# Altium PCB HV_Manager.PcbDoc
Units mm, origin at the board's own origin, x right, y up, seen from the top; angles counter-clockwise.
Board outline 132.97 x 62.61 mm, 2 copper layers (Top Layer, Bottom Layer); 79 components, 63 nets, 330 pads, 37 vias.
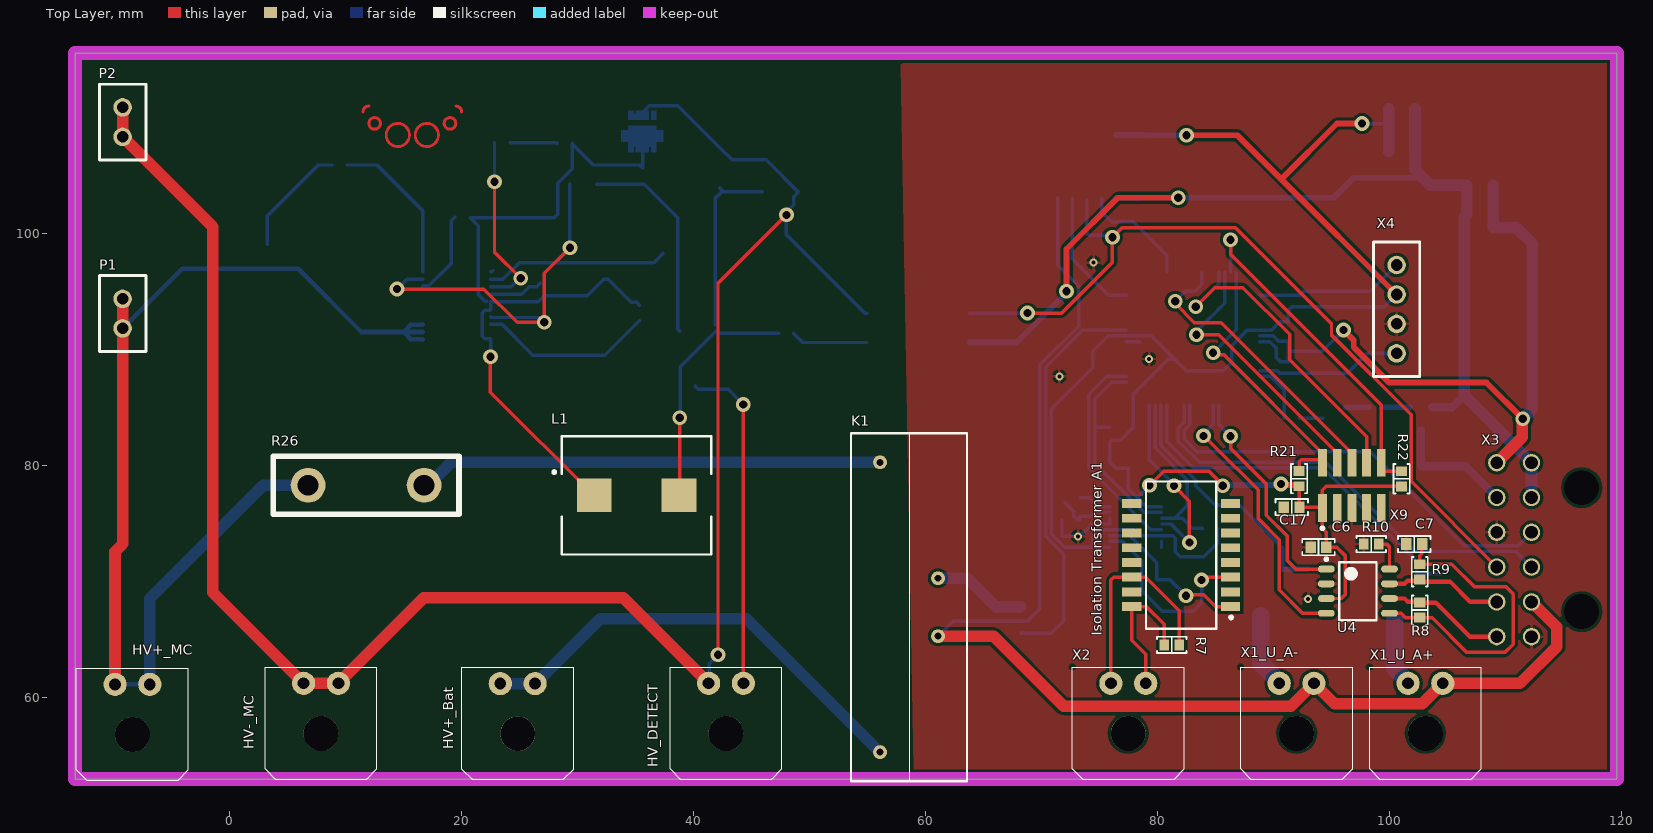
[diagram p0: Top Layer view]
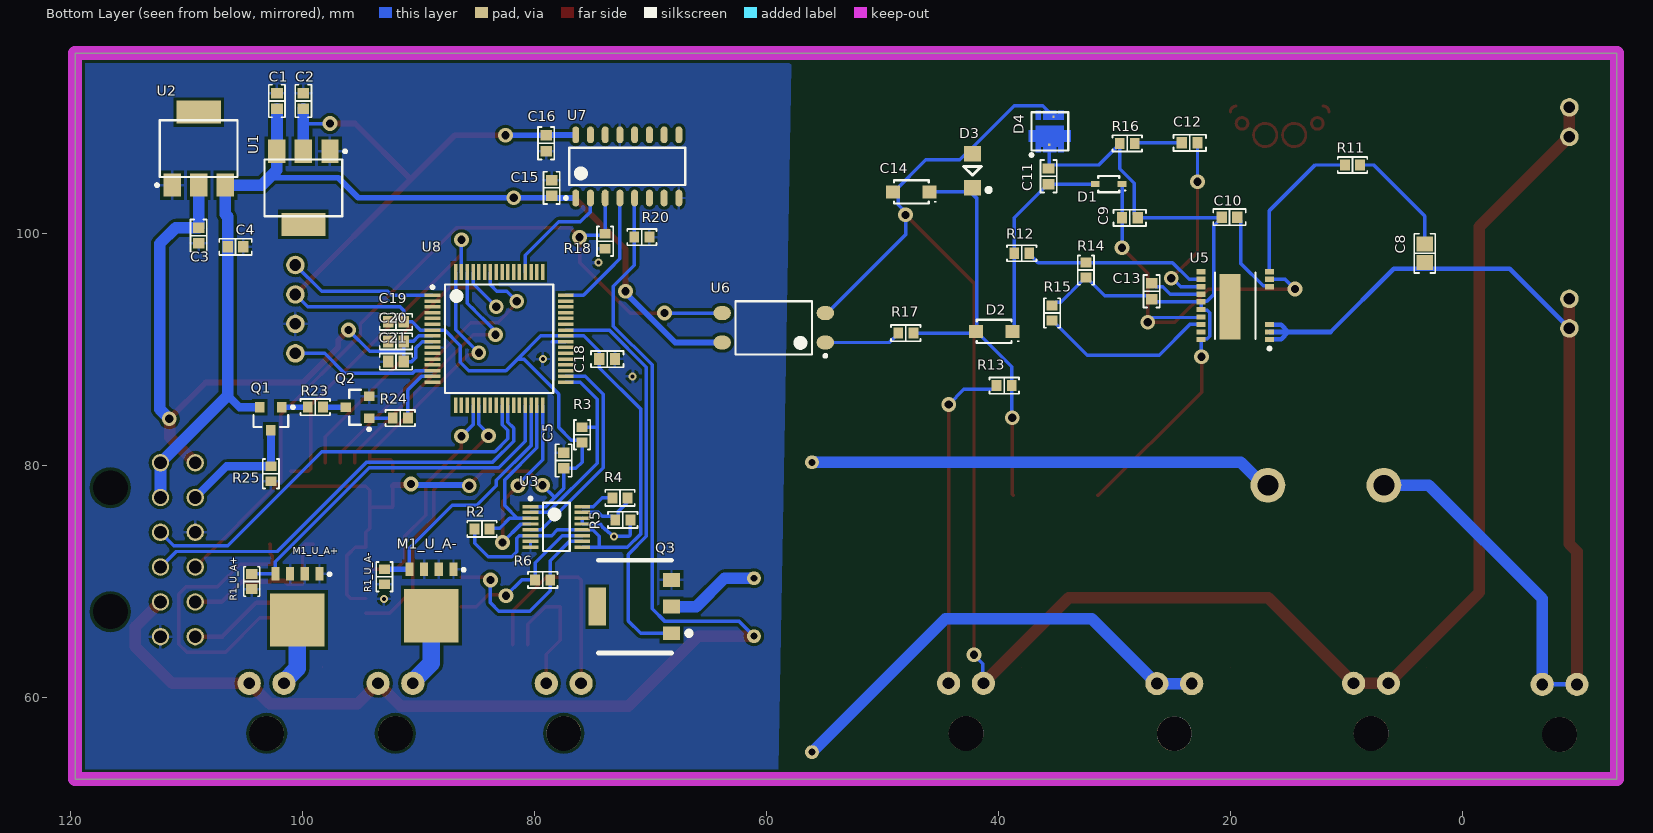
[diagram p1: Bottom Layer view, seen from below]
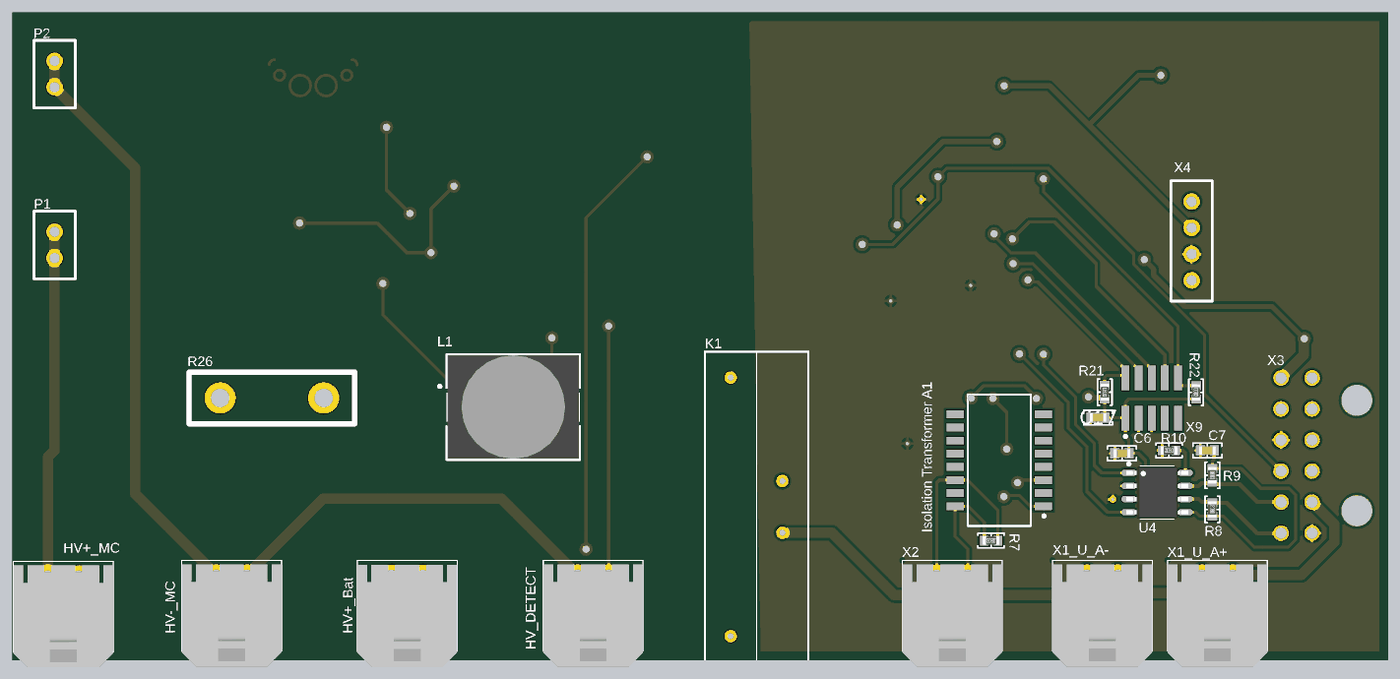
[diagram p2: 3D render of the assembled board from above, using the file's embedded part models]
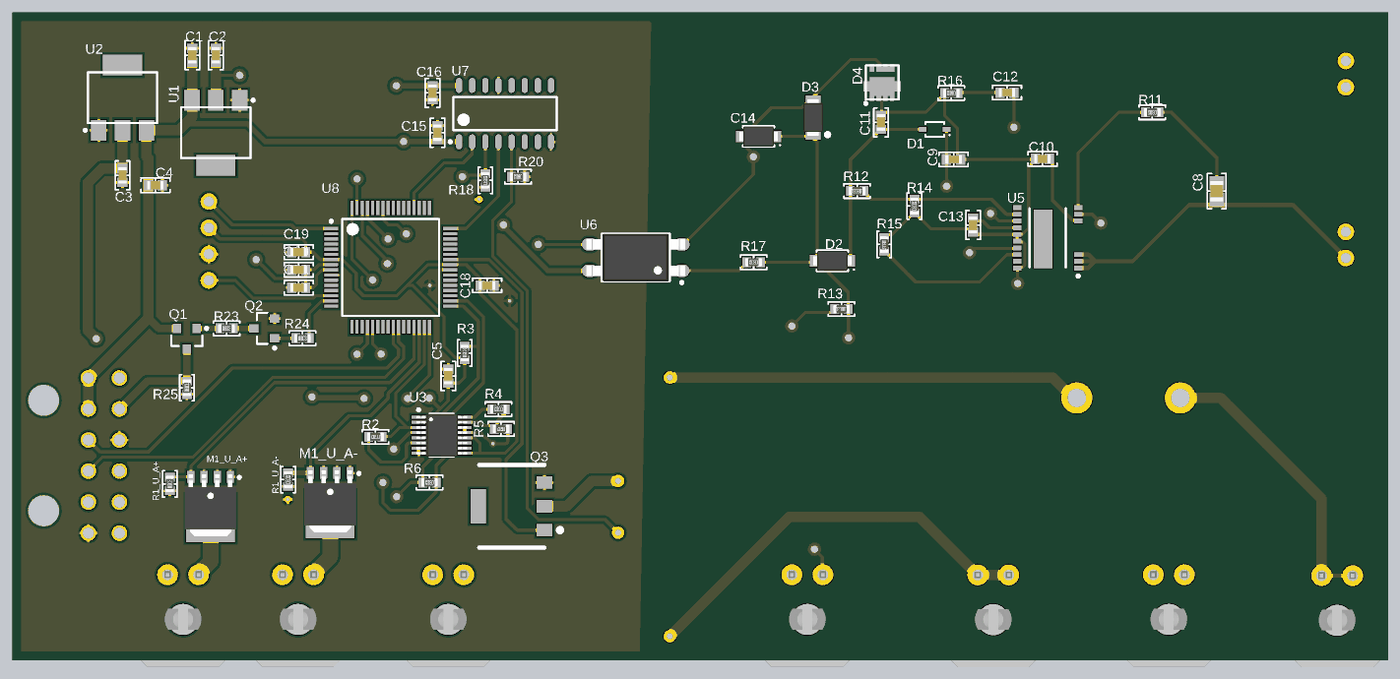
[diagram p3: 3D render of the assembled board from below, using the file's embedded part models]

## Layer stack, top to bottom
Top Solder: solder mask 0.0102, Solder Resist, Dk 3.5
Top Layer: signal copper 0.0356
Dielectric 1: dielectric 0.32, FR-4, Dk 4.8
Bottom Layer: signal copper 0.0356
Bottom Solder: solder mask 0.0102, Solder Resist, Dk 3.5

## Board outline
119.634,115.57 119.634,52.959 -13.335,52.959 -13.335,115.57

## Design rules (kind name [scope] priority, off if disabled: settings)
Clearance [All] p1: gap=0.254 ignorepadtopadclearanceinfootprint=FALSE except(0: Arc-Hole Track-Hole SMDPad-Hole THPad-Hole Via-Hole Fill-Hole Poly-Hole Region-Hole Text-Hole; 0.2: Arc-Arc Arc-Track Arc-SMDPad Track-Track Track-SMDPad SMDPad-SMDPad Fill-Fill Fill-Poly Fill-Region Poly-Poly Poly-Region Region-Region)
DiffPairsRouting [All] p1: maxlimit=10 minlimit=0.254 mostfreqgap=0.254 toplayer_minwidth=0.3 toplayer_maxwidth=10 toplayer_prefwidth=1 bottomlayer_minwidth=0.3 bottomlayer_maxwidth=10 bottomlayer_prefwidth=1 substack1={EFEC684D-6C0E-4148-81E6-19DE09CC9F24} toplayer_{efec684d-6c0e-4148-81e6-19de09cc9f24}_maxgap=0.254 toplayer_{efec684d-6c0e-4148-81e6-19de09cc9f24}_minwidth=0.381 toplayer_{efec684d-6c0e-4148-81e6-19de09cc9f24}_maxwidth=0.381 toplayer_{efec684d-6c0e-4148-81e6-19de09cc9f24}_prefwidth=0.381 bottomlayer_{efec684d-6c0e-4148-81e6-19de09cc9f24}_maxgap=0.254 bottomlayer_{efec684d-6c0e-4148-81e6-19de09cc9f24}_minwidth=0.381 bottomlayer_{efec684d-6c0e-4148-81e6-19de09cc9f24}_maxwidth=0.381 bottomlayer_{efec684d-6c0e-4148-81e6-19de09cc9f24}_prefwidth=0.381 substack2={68C8D38E-4BFC-4960-A612-7F8D2B51FFC0} toplayer_{68c8d38e-4bfc-4960-a612-7f8d2b51ffc0}_maxgap=0.254 toplayer_{68c8d38e-4bfc-4960-a612-7f8d2b51ffc0}_minwidth=0.381 toplayer_{68c8d38e-4bfc-4960-a612-7f8d2b51ffc0}_maxwidth=0.381 toplayer_{68c8d38e-4bfc-4960-a612-7f8d2b51ffc0}_prefwidth=0.381 bottomlayer_{68c8d38e-4bfc-4960-a612-7f8d2b51ffc0}_maxgap=0.254 bottomlayer_{68c8d38e-4bfc-4960-a612-7f8d2b51ffc0}_minwidth=0.381 bottomlayer_{68c8d38e-4bfc-4960-a612-7f8d2b51ffc0}_maxwidth=0.381 bottomlayer_{68c8d38e-4bfc-4960-a612-7f8d2b51ffc0}_prefwidth=0.381 maxuncoupledlength=12.7
PolygonConnect [All] p1: connectstyle=Relief reliefconductorwidth=0.254 reliefentries=4 polygonreliefangle="90 Angle" airgapwidth=0.254
RoutingVias [All] p1: holewidth=0.711 width=1.27 viastyle="Through Hole" minholewidth=0.711 minwidth=1.27 maxholewidth=0.711 maxwidth=1.27
SolderMaskExpansion [All] p1: expansion=0.102
Width [All] p1: maxlimit=10 minlimit=0.254 preferedwidth=0.254
29 further rules are at their usual default settings.

## Classes and differential pairs
component class U_connector: X3
channel class "Air Control": U_A+ U_A-
component class U_Precharge: K1 Q3 R26 R36
component class U_MKE1xFxxxVLH: C17 C18 C19 C20 C21 Q1 Q2 R21 R22 R23 R24 R25 U8 X9
component class U_levelshift6x: C15 C16 R20 U7
component class U_HV_Detect: C8 C9 C10 C11 C12 C13 C14 D1 D2 D3 D4 HV_DETECT L1 R11 R12 R13 R14 R15 R16 R17 R18 U5 U6
component class U_DCDC: L2 P1 P2 X4
component class U_CAN_5V: C6 C7 R8 R9 R10 U4
component class "U_BMS Communications": C5 "Isolation Transformer A1" R2 R3 R4 R5 R6 R7 U3 X2
component class U_A-: M1_U_A- R1_U_A- X1_U_A-
component class U_A+: M1_U_A+ R1_U_A+ X1 X1_U_A+
component class HVBlocks: HV+_Bat HV+_MC HV-_MC
component class 12V_5V: C1 C2 C3 C4 U1 U2
differential pair DOWN: +DOWN_P -DOWN_N
differential pair CAN: +CAN_P -CAN_N

## Components (designator, comment, footprint, x,y, rotation, side; value= is the part's Value field where it differs from the comment)
C1 "capacitor" 0603 102.22,111.434 r270 bottom
C2 "capacitor" 0603 99.949,111.434 r270 bottom
C3 "capacitor" 0603 108.966,99.822 r90 bottom
C4 "capacitor" 0603 105.791,98.861 r0 bottom
C5 "capacitor" 0603 77.494,80.422 r270 bottom
C6 "capacitor" 0603 93.892,72.956 r0 top
C7 "capacitor" 0603 102.151,73.23 r180 top
C8 "Value" "CAP 0805/2012" 3.245,98.294 r270 bottom
C9 "capacitor" 0603 28.672,101.362 r180 bottom
C10 "capacitor" 0603 20.083,101.412 r0 bottom
C11 "capacitor" 0603 35.685,104.939 r270 bottom
C12 "capacitor" 0603 23.514,107.829 r180 bottom
C13 "capacitor" 0603 26.785,95.027 r90 bottom
C14 "Capacitor_Electrolytic" CMMR1U-06 47.516,103.589 r0 bottom
C15 "capacitor" 0603 78.538,103.941 r270 bottom
C16 "capacitor" 0603 79.013,107.791 r90 bottom
C17 "capacitor" 0603 91.581,76.409 r0 top
C18 "capacitor" 0603 73.744,89.182 r0 bottom
C19 "capacitor" 0603 91.945,92.395 r180 bottom
C20 "capacitor" 0603 91.945,90.696 r180 bottom
C21 "capacitor" 0603 91.945,88.966 r180 bottom
D1 "Schottky" SOD323 30.497,104.264 r0 bottom
D2 "diode" CMMR1U-06 40.382,91.564 r0 bottom
D3 "" SOD123F 42.245,105.414 r270 bottom
D4 "diode" C3D1P7060Q 35.632,108.428 r180 bottom
HV+_Bat "*" "CONN 43650-0200 MOLEX 2PIN" 24.838,56.875 r0 top (schematic designator X8)
HV+_MC "*" "CONN 43650-0200 MOLEX 2PIN" -8.386,56.807 r0 top (schematic designator X6)
HV-_MC "*" "CONN 43650-0200 MOLEX 2PIN" 7.874,56.896 r0 top (schematic designator X7)
HV_DETECT "" "CONN 43650-0200 MOLEX 2PIN" 42.799,56.896 r0 top (schematic designator X5)
"Isolation Transformer A1" "HX1188NL" PULS-MODULE-16_V 82.043,72.277 r180 top
K1 "LI24-1A85" LI24-1A85 58.587,67.778 r270 top
L1 "1.5mH" SDR1005 35.088,77.429 r0 top
M1_U_A+ "PSMN2R2-25YLC" POWER-SO8 100.457,67.975 r270 bottom (schematic designator M1)
M1_U_A- "PSMN2R2-25YLC" POWER-SO8 88.9,68.356 r270 bottom (schematic designator M1)
P1 "M20-9990246" M20-9990246 -9.227,94.368 r90 top value=CONN
P2 "M20-9990246" M20-9990246 -9.227,110.878 r90 top value=CONN
Q1 "PNP Transistor" SOT23-3 102.746,84.028 r270 bottom
Q2 "MMBT4401" SOT23-3 95.274,85.028 r0 bottom
Q3 "STN3NF06L" STN3NF06L 68.199,65.532 r90 bottom
R1_U_A+ "10k" "RES 0603/1608" 104.394,69.992 r90 bottom (schematic designator R1)
R1_U_A- "10k" "RES 0603/1608" 92.964,70.406 r90 bottom (schematic designator R1)
R2 "10K" "RES 0603/1608" 84.531,74.544 r0 bottom
R3 "10K" "RES 0603/1608" 75.907,82.646 r90 bottom
R4 "1.4k" "RES 0603/1608" 72.644,77.216 r0 bottom
R5 "600" "RES 0603/1608" 72.394,75.311 r0 bottom
R6 "60" "RES 0603/1608" 79.308,70.132 r0 bottom
R7 "120" "RES 0603/1608" 81.24,64.522 r180 top
R8 "60" "RES 0603/1608" 102.626,67.53 r90 top
R9 "60" "RES 0603/1608" 102.626,70.832 r270 top
R10 "100" "RES 0603/1608" 98.442,73.23 r180 top
R11 "4.99k" "RES 0603/1608" 9.48,105.914 r0 bottom
R12 "11k" "RES 0603/1608" 37.997,98.303 r0 bottom
R13 "5k" "RES 0603/1608" 39.507,86.897 r0 bottom
R14 "1.24k" "RES 0603/1608" 32.457,96.85 r90 bottom
R15 "0.33" "RES 0603/1608" 35.377,93.147 r270 bottom
R16 "22.1 k" "RES 0603/1608" 28.897,107.773 r0 bottom
R17 "12K" "RES 0603/1608" 47.991,91.42 r0 bottom
R18 "10K" "RES 0603/1608" 73.915,99.338 r90 bottom
R20 "4.7K" "RES 0603/1608" 70.754,99.691 r0 bottom
R21 "10K" "RES 0603/1608" 92.231,78.867 r270 top
R22 "10K" "RES 0603/1608" 101.053,78.85 r270 top
R23 "5k" "RES 0603/1608" 98.914,85.028 r180 bottom
R24 "5k" "RES 0603/1608" 91.581,84.078 r180 bottom
R25 "10k" "RES 0603/1608" 102.746,79.289 r90 bottom
R26 "Resistor 1k2 100W 1% Throughhole" AP101 16.766,78.302 r180 top value=1.2k
U1 "NCP1117ST50T3G" SOT-223-3 99.949,103.941 r270 bottom
U2 "NCP1117ST50T3G" SOT-223-3 108.966,107.329 r90 bottom
U3 "LTC6820" MSOP-16 78.132,74.706 r180 bottom
U4 "MCP2561 CAN Transceiver" SOIC-8 97.292,69.166 r0 top
U5 "LT8315" TSSOP20-Thermal 19.583,93.787 r0 bottom
U6 "CPC1393" CPC1393GR 59.381,91.877 r0 bottom value=Null
U7 "CD4504BM96" SOIC-16 72.009,105.791 r90 bottom
U8 "MKE18F512VLH16" TQFP64 83.058,90.932 r180 bottom
X1_U_A+ "" "CONN 43650-0200 MOLEX 2PIN" 103.115,56.896 r0 top (schematic designator X1)
X1_U_A- "" "CONN 43650-0200 MOLEX 2PIN" 92.005,56.896 r0 top (schematic designator X1)
X2 "" "CONN 43650-0200 MOLEX 2PIN" 77.494,56.896 r0 top
X3 "4-794619-2" 4-794619-2 112.266,80.239 r90 top
X4 "4 pin header" 4pinheader 100.628,97.289 r90 top
X9 "CN-2P-M-R10" HDR2X5_SMT 96.774,78.289 r0 top

## Footprints (in the part's own frame and the unit in brackets; to place one, negate y for a bottom-side part, rotate by r counter-clockwise, add the part's x,y. Pads: shape width x height; smd on the part's side, far side on the other; paste and mask are expansions set on the pad)
4-794619-2 [mm] "12 pin te"
  round 1.5 hole 1.1: 1(0,3) 2(-3,3) 3(-6,3) 4(-9,3) 5(-12,3) 6(-15,3) 7(0,0) 8(-3,0) 9(-6,0) 10(-9,0) 11(-12,0) 12(-15,0)
  round 0 hole 3: ""(-12.84,-4.32) ""(-2.16,-4.32)
4pinheader [mm]
  round 1.6 hole 1: 1(-7.62,0) 2(-5.08,0) 3(-2.54,0) 4(0,0)
  silkscreen extent -9.62,-2 2,2
0603 [mm]
  rect 0.9x1 smd: 1(-0.675,0) 2(0.675,0)
  silkscreen extent -1.4,-0.7 1.4,0.7, body extent -0.8,-0.41 0.8,0.41, height 0.82
AP101 [mm] "100W Through Hole Resistor"
  round 3 hole 1.8: 1(0,0) 2(10,0)
  silkscreen extent -3,-2.5 13,2.5, body extent -3,-2.5 13,2.5, height 24.5
C3D1P7060Q [mm]
  rect 0.2x0.2 smd paste+0 mask+0: 1(0,-0.762)
  rect 0.2x0.2 smd paste+0: 2(0.381,1.651)
  Top Layer region: -1.143,0.889 1.247,0.889 1.247,0.489 1.852,0.489 1.852,-0.521 1.247,-0.521 1.247,-1.421 0.807,-1.421 0.807,-0.921 0.597,-0.921 0.597,-1.421 0.157,-1.421 0.157,-0.921 -0.053,-0.921 -0.053,-1.421 -0.493,-1.421 -0.493,-0.921 -0.703,-0.921 -0.703,-1.421 -1.143,-1.421 -1.143,-0.521 -1.748,-0.521 -1.748,0.489 -1.143,0.489
  Top Layer region: -0.493,1.379 1.247,1.379 1.247,2.179 0.807,2.179 0.807,1.879 0.597,1.879 0.597,2.179 0.157,2.179 0.157,1.879 -0.053,1.879 -0.053,2.179 -0.493,2.179
  Top Layer region: -1.143,1.379 -0.703,1.379 -0.703,2.179 -1.143,2.179
  silkscreen extent -1.64,-1.77 1.65,2.03
"CAP 0805/2012" [mm] "Chip Capacitor, 2-Leads, Body 2.00x1.20mm, IPC Medium Density"
  rect 1.3x1.4 smd: 1(-0.8,0) 2(0.8,0)
  silkscreen extent -1.7,-0.9 1.7,0.9, body extent -1,-0.64 1,0.64, height 1.26
CMMR1U-06 [mm] "SODFL, 2-Leads, Body 1.80x3.75mm, IPC Medium Density"
  rect 1.2x1.1 smd: 1(-1.575,0) 2(1.575,0)
  silkscreen extent -2.12,-1 1.5,1, body extent -1.87,-0.97 1.87,0.98, height 1.08
"CONN 43650-0200 MOLEX 2PIN" [mm] "MOLEX-43650-0200, 2PIN"
  round 2 hole 1.02: 1(-1.5,4.32) 2(1.5,4.32)
  round 3 hole 3 unplated: MH(0,0)
  Top Layer lines w0.1: -4.824,5.715 -4.822,5.713
  silkscreen extent -4.82,-3.94 4.83,5.71, body extent -4.82,-4.58 4.83,5.32, height 5.62
CPC1393GR [mm] "CPC1393GR, 4-Leads, Body 4.57x6.35mm, Pitch 2.54mm, IPC Medium Density"
  oval 1.5x1.2 smd: 1(-4.45,1.27) 2(-4.45,-1.27) 3(4.45,-1.27) 4(4.45,1.27)
  silkscreen extent -4.57,-2.3 3.3,2.54, body extent -4.76,-2.3 4.76,2.3, height 3.3
HDR2X5_SMT [mm] "Header, 10-Leads, Body 3.43x6.35mm, Pitch 1.27mm"
  rect 0.76x2.4 smd: 1(-2.54,-1.95) 2(-2.54,1.95) 3(-1.27,-1.95) 4(-1.27,1.95) 5(0,-1.95) 6(0,1.95) 7(1.27,-1.95) 8(1.27,1.95) 9(2.54,-1.95) 10(2.54,1.95)
  silkscreen extent -2.66,-3.82 -2.41,-3.58, body extent -3.17,-1.72 3.17,1.72, height 4.55
LI24-1A85 [mm]
  round 1.2 hole 0.6: 1(2.5,2.5) 2(-2.5,2.5) 3(12.5,-2.5) 4(-12.5,-2.5)
  silkscreen extent -15,-5 15,5
M20-9990246 [mm]
  round 1.6 hole 1: 1(-2.54,0) 2(0,0)
  silkscreen extent -4.54,-2 2,2
MSOP-16 [mm]
  rect 1.35x0.3 smd: 1(-2.225,1.75) 2(-2.225,1.25) 3(-2.225,0.75) 4(-2.225,0.25) 5(-2.225,-0.25) 6(-2.225,-0.75) 7(-2.225,-1.25) 8(-2.225,-1.75) 9(2.225,-1.75) 10(2.225,-1.25) 11(2.225,-0.75) 12(2.225,-0.25) 13(2.225,0.25) 14(2.225,0.75) 15(2.225,1.25) 16(2.225,1.75)
  silkscreen extent -2.35,-2.08 1.15,2.57, body extent -2.45,-2.05 2.45,2.05, height 1.1
POWER-SO8 [mm]
  rect 4.6x4.7 smd: D(1.3,0)
  rect 1.15x0.7 smd: G(-2.7,-1.905) S(-2.7,-0.635) S(-2.7,0.635) S(-2.7,1.905)
  silkscreen extent -2.77,2.65 -2.53,2.9, body extent -2.95,-2.5 3.05,2.5, height 1.25
PULS-MODULE-16_V [mm] "SOIC, 16-Leads, Body 12.7x7.11mm, Pitch 1.27mm"
  rect 1.67x0.76 smd paste+0: 1(-4.265,4.445) 2(-4.265,3.175) 3(-4.265,1.905) 4(-4.265,0.635) 5(-4.265,-0.635) 6(-4.265,-1.905) 7(-4.265,-3.175) 8(-4.265,-4.445) 9(4.265,-4.445) 10(4.265,-3.175) 11(4.265,-1.905) 12(4.265,-0.635) 13(4.265,0.635) 14(4.265,1.905) 15(4.265,3.175) 16(4.265,4.445)
  silkscreen extent -4.44,-6.35 3.03,6.35, body extent -3.55,-6.35 3.55,6.35, height 5.97
"RES 0603/1608" [mm] "Chip Resistor, 2-Leads, Body 1.60x0.80mm, IPC Medium Density"
  rect 0.85x0.95 smd: 1(-0.65,0) 2(0.65,0)
  silkscreen extent -1.27,-0.7 1.27,0.7, body extent -0.8,-0.4 0.8,0.4, height 0.45
SDR1005 [mm] "Precision Wire Wound Inductor, 2-Leads, Body 12.70x10.00mm, IPC Medium Density"
  rect 3x2.9 smd: 1(-3.65,0) 2(3.65,0)
  silkscreen extent -7.22,-5.1 6.45,5.1, body extent -6.45,-5 6.45,5, height 5.4
SOD123F [mm] "SODFL, 2-Leads, Body 1.80x3.50mm, IPC Low Density"
  rect 1.35x1.45 smd: 1(-1.475,0) 2(1.475,0)
  silkscreen extent -0.38,-0.76 1.75,1.5, body extent -1.75,-0.95 1.75,0.95, height 1.15
SOD323 [mm] "Not to be confused with SOD323F"
  rect 0.75x0.5 smd: 1(-1.15,0) 2(1.15,0)
  silkscreen extent -1.47,-0.7 0.9,0.7, body extent -0.9,-0.67 0.9,0.67, height 0.9
SOIC-8 [mm] "SOIC, 8-Leads, Body 4.90x3.90mm, Pitch 1.27mm, IPC Medium Density"
  oval 1.45x0.6 smd: 1(-2.725,1.905) 2(-2.725,0.635) 3(-2.725,-0.635) 4(-2.725,-1.905) 5(2.725,-1.905) 6(2.725,-0.635) 7(2.725,0.635) 8(2.725,1.905)
  silkscreen extent -2.85,-2.5 1.6,2.88, body extent -3,-2.5 3,2.5, height 1.75
SOIC-16 [mm]
  oval 1.45x0.6 smd: 1(-2.725,4.445) 2(-2.725,3.175) 3(-2.725,1.905) 4(-2.725,0.635) 5(-2.725,-0.635) 6(-2.725,-1.905) 7(-2.725,-3.175) 8(-2.725,-4.445) 9(2.725,-4.445) 10(2.725,-3.175) 11(2.725,-1.905) 12(2.725,-0.635) 13(2.725,0.635) 14(2.725,1.905) 15(2.725,3.175) 16(2.725,4.445)
  silkscreen extent -2.85,-5 1.6,5.42, body extent -2,-5 2,5, height 1.75
SOT23-3 [mm] "SOT23, 3-Leads, Body 2.92x2.37mm, Pitch 0.95mm, IPC Medium Density, NUP2105L"
  rect 0.9x0.8 smd: 1(-1,0.95) 2(-1,-0.95) 3(1,0)
  silkscreen extent -1.12,-1.5 0.7,2.02, body extent -0.7,-1.52 0.7,1.52, height 1.11
SOT-223-3 [mm] "SOT223127P600-8N, NCP1117STAT3G, MMBT4403-7-F"
  rect 2x1.5 smd: 1(-3.15,2.3) 2(-3.15,0) 3(-3.15,-2.3)
  rect 2x3.8 smd: THM(3.15,0)
  silkscreen extent -3.27,-3.35 2.45,3.72, body extent -1.85,-3.35 1.85,3.35, height 1.8
STN3NF06L [mm] "N-channel Power MOSFET"
  rect 1.2x1.5 smd: 1(0,0) 2(2.3,0) 3(4.6,0)
  rect 3.3x1.5 smd: 4(2.3,6.4)
  silkscreen extent -1.7,-1.7 6.3,6.3
TQFP64 [mm] "TSQFP, 64-Leads, Body 10.00x10.00mm, Pitch 0.50mm, IPC Medium Density, MKE18F512VLH16"
  rect 1.35x0.3 smd: 1(-5.75,3.75) 2(-5.75,3.25) 3(-5.75,2.75) 4(-5.75,2.25) 5(-5.75,1.75) 6(-5.75,1.25) 7(-5.75,0.75) 8(-5.75,0.25) 9(-5.75,-0.25) 10(-5.75,-0.75) 11(-5.75,-1.25) 12(-5.75,-1.75) 13(-5.75,-2.25) 14(-5.75,-2.75) 15(-5.75,-3.25) 16(-5.75,-3.75) 33(5.75,-3.75) 34(5.75,-3.25) 35(5.75,-2.75) 36(5.75,-2.25) 37(5.75,-1.75) 38(5.75,-1.25) 39(5.75,-0.75) 40(5.75,-0.25) 41(5.75,0.25) 42(5.75,0.75) 43(5.75,1.25) 44(5.75,1.75) 45(5.75,2.25) 46(5.75,2.75) 47(5.75,3.25) 48(5.75,3.75)
  rect 0.3x1.35 smd: 17(-3.75,-5.75) 18(-3.25,-5.75) 19(-2.75,-5.75) 20(-2.25,-5.75) 21(-1.75,-5.75) 22(-1.25,-5.75) 23(-0.75,-5.75) 24(-0.25,-5.75) 25(0.25,-5.75) 26(0.75,-5.75) 27(1.25,-5.75) 28(1.75,-5.75) 29(2.25,-5.75) 30(2.75,-5.75) 31(3.25,-5.75) 32(3.75,-5.75) 49(3.75,5.75) 50(3.25,5.75) 51(2.75,5.75) 52(2.25,5.75) 53(1.75,5.75) 54(1.25,5.75) 55(0.75,5.75) 56(0.25,5.75) 57(-0.25,5.75) 58(-0.75,5.75) 59(-1.25,5.75) 60(-1.75,5.75) 61(-2.25,5.75) 62(-2.75,5.75) 63(-3.25,5.75) 64(-3.75,5.75)
  silkscreen extent -5.88,-4.67 4.67,4.68, body extent -5,-5 5,5, height 1.6
TSSOP20-Thermal [mm] "Standard TSSOP20 package with an exposed thermal pad underneath"
  rect 0.8x0.45 smd: 1(-2.95,2.925) 2(-2.95,2.275) 3(-2.95,1.625) 8(-2.95,-1.625) 9(-2.95,-2.275) 10(-2.95,-2.925) 11(2.95,-2.925) 12(2.95,-2.275) 13(2.95,-1.625) 14(2.95,-0.975) 15(2.95,-0.325) 16(2.95,0.325) 17(2.95,0.975) 18(2.95,1.625) 19(2.95,2.275) 20(2.95,2.925)
  rect 1.78x5.68 smd: 21(0.45,0.1)
  silkscreen extent -3.07,-2.85 1.75,3.82

## Part data
C1 C2 C3 C4 C9 C10: library part 1, "Generic 0603 capacitor", capacitance=10uF, Dielectric=Ceramic, package=0603, percent tolerance=10, voltage=50, ESR=1, id=1, name="0603 Capacitor", quantity=0
C5 C15 C16 C17 C18 C19 C20 C21: library part 1, "Generic 0603 capacitor", capacitance=0.1uF, Dielectric=Ceramic, package=0603, percent tolerance=10, voltage=50, ESR=1, id=1, name="0603 Capacitor", quantity=0
C6: library part 1, "Generic 0603 capacitor", capacitance=1uF, Dielectric=Ceramic, package=0603, percent tolerance=10, voltage=50, ESR=1, id=1, name="0603 Capacitor", quantity=0
C7: library part 1, "Generic 0603 capacitor", capacitance=.1uF, Dielectric=Ceramic, package=0603, percent tolerance=10, voltage=50, ESR=1, id=1, name="0603 Capacitor", quantity=0
C8: library part 9, "10pF 500V Ceramic 0805", capacitance=10pF, Dielectric=Ceramic, percent tolerance=5, voltage=500, createdby="Eric Tse", createddate="12/15/2019 9:33:53 PM", id=9, link=https://www.digikey.com/product-detail/en/yageo/CC0805JRNPOBBN100/311-4254-1-ND/8025343, name=CC0805JRNPOBBN100, quantity=1, updatedby="Eric Tse", updateddate="12/15/2019 9:33:53 PM"
C11: library part 1, "Generic 0603 capacitor", capacitance=10nF, Dielectric=Ceramic, package=0603, percent tolerance=10, voltage=50, ESR=1, id=1, name="0603 Capacitor", quantity=0
C12: library part 1, "Generic 0603 capacitor", capacitance=330nF, Dielectric=Ceramic, package=0603, percent tolerance=10, voltage=50, ESR=1, id=1, name="0603 Capacitor", quantity=0
C13: library part 1, "Generic 0603 capacitor", capacitance=100nF, Dielectric=Ceramic, package=0603, percent tolerance=10, voltage=50, ESR=1, id=1, name="0603 Capacitor", quantity=0
C14: library part 10, "10µF 400V Aluminum Electrolytic Capacitors Ra", capacitance=10uF, package="SMD Can", percent tolerance=20, voltage=400, ESR=0, id=10, link=https://www.digikey.com/product-detail/en/nichicon/ULV2G100MNL1GS/493-6741-1-ND/3664308, name=ULV2G100MNL1GS, quantity=0
D1: library part 27, "30V 200mA schottky diode", createdby="Eric Tse", createddate="11/20/2019 6:50:55 PM", id=27, name=CMDSH2-3, numcircuits=1, quantity=1, updatedby="Eric Tse", updateddate="11/20/2019 6:50:55 PM", vr=30
D2: library part 28, "Diode Standard 600V 1A Surface Mount SOD-123F", package=SOD-123F, id=28, link=https://www.digikey.com/product-detail/en/central-semiconductor-corp/CMMR1U-06-TR-PBFREE/1514-CMMR1U-06TRPBFREECT-ND/4807015, name=CMMR1U-06, numcircuits=1, quantity=0, vr=600
D3: library part 10, "Zener Diode 14V 500mW ±5% Surface Mount SOD-1", package=SOD-123, id=10, link=https://www.digikey.com/product-detail/en/diodes-incorporated/DDZ9701-7/DDZ9701-7DICT-ND/3877402, name=DDZ9701, quantity=0
D4: library part 29, "Diode Silicon Carbide Schottky 600V 9.7A (DC)", package=QFN, id=29, link=https://www.digikey.com/product-detail/en/cree-wolfspeed/C3D1P7060Q/C3D1P7060QCT-ND/3586865, name=C3D1P7060Q, numcircuits=1, quantity=0, vr=600
HV+_Bat HV+_MC HV-_MC HV_DETECT X1_U_A+ X1_U_A- X2: library part 9, "Molex 43650_0200", id=9, link=https://www.digikey.com/product-detail/en/molex-llc/0436500200/WM1860-ND/268989, name=0436500200, numcontacts=2, numrows=1, Pitch="3 mm", quantity=0
"Isolation Transformer A1": library part CMP-2000-05323-1, "10/100 Base-T Single Port Surface Mount Magnetic with Turns Ratio, -40 to 85 degC, 16-Pin Module, RoHS, Tube", Inductance=-, Manufacturer="Pulse Electronics", Package Description="16-Pin Surface Mount Device, Body 12.7 x 7.11 mm, Pitch 1.27 mm", Package Reference=MODULE-16, Standard Package=40, Category=Transformers, Datasheet URL=https://datasheet.ciiva.com/26929/hx1188nl-26929858.pdf, Datasheet Version="Rev. H325.Q, 09/2009", E.T.=-, Family=PulseTransformers, Height - Seated (Max)=6.22mm, Manufacturer URL=http://www.pulseelectronics.com/, Mounting Type=SurfaceMount, Online Catalog=10/100BASE-TSinglePort, Other Names=553-1340, Other Related Documents=PackagesFNLvs.NL, PCN Design/Specification=ThermoplasticHeaderDesign28/Jun/2013, PCN Other=HaloInjunctionRes1/Sep/2015, Series=-, Size / Dimension=12.70mmLx7.11mmW, Transformer Type=IsolationandDataInterface(Encapsulated), Turns Ratio - Primary=Secondary:1:1Transmitter,1:1Receiver
K1: library part 3, "RELAY REED SPST 1A 24V", current=1, voltage=12, createdby=gray, id=3, link=https://www.digikey.com/product-detail/en/standex-meder-electronics/LI24-1A85/374-1296-ND/2208755, name=LI24-1A85, quantity=0, Type=Reed
L1: library part 11, "1.5mH inductor", package=SDR1005, resistance=6.3, Tolerance=10, createdby="Marc Wong", createddate="11/22/2019 11:10:33 PM", id=11, imax=0.25, Inductance=1.5mH, link=https://www.digikey.com/product-detail/en/bourns-inc/SDR1005-152KL/SDR1005-152KLCT-ND/2127182, name=SDR1005, quantity=1, updatedby="Marc Wong", updateddate="11/22/2019 11:10:33 PM"
M1_U_A+ M1_U_A-: library part 3, "N-Channel 25V 100A (Tc) 106W (Tc) Surface Mount LFPAK56, Power-SO8", current=100A, package=LFPAK56, id=3, link=https://www.digikey.com/product-detail/en/nexperia-usa-inc/PSMN2R2-25YLC115/1727-5299-1-ND/2674299, name=PSMN2R2-25YLC, numcircuits=1, quantity=0, rdson=2.5mOhm, Type=N_Channel, vdsmax=0, vgsmax=20, vt=4.5
P1 P2: library part 25, "2 Pin VCC Power Header, Male", Manufacturer_id=1, package=Conn, Supplier1PartNo=952-2262-ND, Voltage_Rating=Null, ComponentLink1Description=Null, ComponentLink1URL=https://www.digikey.com/product-detail/en/harwin-inc/M20-9990246/952-2262-ND/3728226, Created_By=Austin, Created_Date=12/15/2018, Drawer_id=1, idConn=25, link=https://www.digikey.com/product-detail/en/harwin-inc/M20-9990246/952-2262-ND/3728226, mfrpartno=M20-9990246, name=M20-9990246, Num_Contacts=2, Num_Rows=Null, Pitch=2.54, Supplier1=Digi-Key, Updated_By=Null
Q1: library part 13, "Bipolar (BJT) Transistor PNP 25V 1.5A 100MHz", package=SOT23-3, Power=625, createdby=Kevin, createddate="10/16/2019 7:23:00 AM", id=13, link=https://www.digikey.com/product-detail/en/micro-commercial-co/MMSS8550-L-TP/MMSS8550-L-TPMSCT-ND/2827205, name=MMSS8550-L-TP, quantity=0, Type=PNP, vcemax=25
Q2: library part 2, package=SOT23-3, id=2, link=https://www.digikey.com/product-detail/en/diodes-incorporated/MMBT4401-7-F/MMBT4401-FDICT-ND/775867, name=MMBT4401, quantity=0, Type=NPN
Q3: library part 8, "MOSFET N-CH 60V 4A SOT223", current=4A, package=SOT-233, id=8, link=https://www.digikey.com/product-detail/en/stmicroelectronics/STN3NF06L/497-3177-1-ND/654516, name=STN3NF06L, numcircuits=1, quantity=0, rdson=70m, Type=N_Channel, vdsmax=0, vgsmax=0
R1_U_A+ R1_U_A- R2 R3 R4 R5 R6 R7 R8 R9 R10 R11 R12 R13 R14 R15 R16 R17 R18 R20 R21 R22 R23 R24 R25: library part 1, package=0603, percent tolerance=5, id=1, name="0603 Resistor", quantity=0
  R1_U_A+ R1_U_A- R25: resistance=10k
  R2 R3 R18 R21 R22: resistance=10K
  R4: resistance=1.4k
  R5: resistance=600
  R6 R8 R9: resistance=60
  R7: resistance=120
  R10: resistance=100
  R11: resistance=4.99k
  R12: resistance=11k
  R13 R23 R24: resistance=5k
  R14: resistance=1.24k
  R15: resistance=0.33
  R16: resistance="22.1 k"
  R17: resistance=12K
  R20: resistance=4.7K
R26: library part 2705, "100W Throughhole Resistor", Manufacturer_id=1, mfrpartno="AP101 1K2 J", package=TO-247-2, Power=100W, Supplier Part Number 1=AP1011K2J-ND, Tolerance=5%, ComponentLink1Description=Datasheet, ComponentLink1URL=https://www.ohmite.com/assets/docs/acl_ap101.pdf?r=false, Created_By=Graydon, Created_Date=2018-11-24, Drawer_id=1, idResistor=2705, link=https://www.digikey.com/short/jvdcjz, name="AP101 1K2 J", Supplier 1=Digi-Key
U1 U2: library part 16, "5V linear regulator", package=SOT-223-3, id=16, imax=1, link=https://www.digikey.com/product-detail/en/on-semiconductor/NCP1117ST50T3G/NCP1117ST50T3GOSCT-ND/1967217, name=NCP1117ST50T3G, quantity=0
U3: library part 7, "soSPI Isolated / Communications Interface", Manufacturer_id=1, package=MSOP-16, Drawer_id=1, id=7, idFuse=3, link=https://www.mouser.com/ProductDetail/Analog-Devices/LTC6820IMSPBF?qs=sGAEpiMZZMvi6wO7nhr1LyTLeBC7dAWQpR44bZH0zYY%3d, name=null, quantity=0, Type=isoSPI, vcc=0
U4: library part 5, package=SOIC-8, id=5, link=https://www.digikey.com/product-detail/en/microchip-technology/MCP2561T-E-SN/MCP2561T-E-SNCT-ND/5148846, name=null, quantity=0, Type=CAN, vcc=0
U5: library part 19, "560Vin - 12Vout Buck Converter", createdby="Eric Tse", createddate="11/20/2019 18:54:34", id=19, imax=0.119999997317791, link=https://www.digikey.com/en/product-highlight/l/linear-tech/lt8315-isolated-flyback-converter, name=LT8315, quantity=1, updatedby="Eric Tse", updateddate="11/20/2019 18:54:34"
U6: library part 26, "Solid State Relay SPST-NO (1 Form A) 4-SMD (0.300\", 7.62mm)", Manufacturer_id=1, mfrpartno=CPC1393GRTR, package=CPC1393GR, Supplier1PartNo=Null, ComponentLink1Description=Null, ComponentLink1URL=Null, Created_By=Lynette, Data_Rate=Null, Drawer_id=1, idIC_Misc=26, link=https://www.digikey.com/product-detail/en/ixys-integrated-circuits-division/CPC1393GRTR/CLA270CT-ND/1277144, name=CPC1393, Num_Circuits=1, Protocol=Null, Supplier1=Null, Type=Null, Updated_By=Null, Vin(Max)=Null, Vin(Min)=Null
U7: library part 1, "Voltage Level Translator Unidirectional 1 Cir", package=SOIC-16, id=1, link=https://www.digikey.com/product-detail/en/texas-instruments/CD4504BM96/296-14150-2-ND/525968, name=CD4504BM96, quantity=0, Type="Level shifter CMOS-CMOS", vcc=20
U8: library part 1, "32b NXP Microcontroller", package=TQFP64, id=1, name=MKE18F512VLH16, quantity=0, vcc=2.7-5.5
X3: library part 41, "12p te", id=41, link=https://www.digikey.com/product-detail/en/te-connectivity-amp-connectors/4-794619-2/A115204-ND/2286935, name=4-794619-2, numcontacts=12, numrows=2, Pitch=3mm, quantity=0
X4: library part 40, package=.1in, id=40, name=4pinheader, numcontacts=4, numrows=1, Pitch=.1in, quantity=0
X9: library part 4, "CONN_TE_2X5POS", id=4, link=https://www.digikey.com/product-detail/en/5103309-1/A33160-ND/1114898?utm_campaign=buynow&WT.z_cid=ref_octopart_dkc_buynow&utm_medium=aggregator&curr=usd&site=us&utm_source=octopart, name=5103309-1, numcontacts=10, numrows=2, Pitch=2.54mm, quantity=0

## Via types
v1: diameter 1.27, hole 0.711, Top Layer to Bottom Layer, tented both sides, 32 vias
v2: diameter 0.7, hole 0.35, Top Layer to Bottom Layer, tented both sides, 3 vias
v3: diameter 0.7, hole 0.35, Top Layer to Bottom Layer, 2 vias

## Nets (pads, with @x,y where several pads share a name; then routed paths per layer and width w, separated by ;. In a path a pad name is that pad's centre, name@x,y a point inside that pad or via, vN(x,y) a via of type N, cw(c..) or ccw(c..) an arc to the next point about the centre after c; other vN are vias at no path point)
12V: C1.2 C4.2 C15.2 Q1.2 U1.3 U2.3 U6.4 U7.1 X3.7 X3.8 | length 95.4
  Top Layer w0.5: v1(72.169,95.032) 72.169,98.669 76.591,103.091 v1(81.808,103.091)
  Bottom Layer w0.5: U6.4 67.87,90.607 72.169,94.906 v1(72.169,95.032) ; U7.1 76.466,103.078 78.525,103.078 78.538,103.091 v1(81.808,103.091) 95.211,103.091 96.943,104.823 102.889,104.823
  Bottom Layer w0.7: Q1.2 105.455,85.028 106.466,86.039
  Bottom Layer w1: C1.2 102.22,107.12 U1.3 102.246,107.088 102.246,105.466 102.889,104.823 103.533,104.179 U2.3 106.666,101.675 106.466,101.475 C4.2 106.466,86.039 X3.7 X3.8
AIR+_EN: M1_U_A+.G R1_U_A+.2 U8.29 | length 32
  Bottom Layer w0.3: U8.29 80.808,82.089 83.097,79.8 94.262,79.8 102.362,71.7 M1_U_A+.G 104.361,70.675 R1_U_A+.2
AIR-_EN: M1_U_A-.G R1_U_A-.2 U8.30 | length 21.9
  Bottom Layer w0.3: U8.30 80.308,81.722 83.308,78.722 83.308,78.264 84.998,76.574 87.09,76.574 90.805,72.859 M1_U_A-.G
  Bottom Layer w0.5: M1_U_A-.G R1_U_A-.2
BMS_OK5: R24.2 U8.15 | length 5
  Bottom Layer w0.3: U8.15 89.756,87.682 90.931,86.507 R24.2
BMS_OK12: Q1.3 R25.2 X3.2 | length 10.7
  Bottom Layer w0.7: Q1.3 R25.2 106.566,79.939 X3.2
CAN_N: R8.2 U4.6 X3.6 | length 10.6
  Top Layer w0.381: U4.6 101.313,68.531 101.579,68.265 102.541,68.265 R8.2 104.013,68.18 106.954,65.239 X3.6
CAN_P: R9.2 U4.7 X3.5 | length 10.2
  Top Layer w0.381: U4.7 101.313,69.801 101.579,70.067 102.511,70.067 R9.2 102.816,69.992 105.233,69.992 106.986,68.239 X3.5
DCDC_En: U8.14 X4.1 | length 12.6
  Bottom Layer w0.3: U8.14 90.314,88.182 90.558,87.938 96.363,87.938 98.093,89.669 X4.1
DCDC_Fault: U8.1 X4.4 | length 12.9
  Bottom Layer w0.3: U8.1 92.314,94.682 92.664,95.032 98.371,95.032 X4.4
DOWN_N: "Isolation Transformer A1.3" R6.1 U3.10 | length 16.8
  Top Layer w0.3: v1(83.808,70.124) 84.056,70.372 86.308,70.372
  Bottom Layer w0.3: U3.10 76.994,73.456 78.658,71.792 R6.1 78.658,69.207 80.423,67.442 83.083,67.442 83.808,68.166 v1(83.808,70.124)
DOWN_P: "Isolation Transformer A1.1" R6.2 U3.11 | length 13.9
  Top Layer w0.3: v1(82.478,68.766) 82.581,68.869 83.986,68.869 85.023,67.832 86.308,67.832
  Bottom Layer w0.3: U3.11 77.613,73.956 79.958,71.611 R6.2 81.12,70.132 81.12,70.124 v1(82.478,68.766)
GND: C1.1 C2.1 C3.1 C4.1 C5.1 C6.1 C7.2 C15.1 C16.1 C17.1 C18.1 C19.1 C20.1 C21.1 M1_U_A+.S M1_U_A-.S Q2.2 Q3.3 R1_U_A+.1 R1_U_A-.1 R5.1 R10.2 R18.1 R20.1 R25.1 U1.1 U2.1 U3.7 U3.8 U3.13 U3.14 U4.2 U7.8 U7.13 U8.10 U8.40 X3.3 X3.12 X4.2 X9.3 X9.5 | length 8.1
  Bottom Layer w0.3: R5.1 71.744,74.131 ccw(c71.989,74.131) 71.989,73.885 v2(73.164,73.885) 74.219,74.743 cw(c74.432,74.743) 74.432,74.956 U3.13 U3.14 ; U8.40 78.481,90.682 ; U3.8 U3.7
  other v2: 71.554,87.682 79.282,89.182
  other v3: 93,68.5 74.5,97.5
HV+_Bat: HV+_Bat.1 HV+_Bat.2 K1.3 | length 39.8
  Bottom Layer w1: HV+_Bat.1 HV+_Bat.2 31.943,66.8 44.565,66.8 K1.3
HV+_MC: C8.2 HV+_MC.1 HV+_MC.2 P1.1 P1.2 R26.2 U5.1 U5.2 U5.3 | length 95.7
  Top Layer w1: HV+_MC.1 -9.886,72.577 -9.227,73.235 P1.1 P1.2
  Bottom Layer w0.4: HV+_MC.1 HV+_MC.2 ; P1.1 -4.093,96.962 5.923,96.962 11.372,91.512 14.993,91.512 ; U5.1 16.624,90.872 15.633,90.872 14.993,91.512 ; U5.2 14.993,91.512 ; U5.3 16.624,92.153 15.633,92.153 14.993,91.512
  Bottom Layer w1: HV+_MC.2 -6.886,68.527 2.89,78.302 R26.2
HV-_MC: C14.2 D3.1 D4.2 HV-_MC.1 HV-_MC.2 HV_DETECT.1 P2.1 P2.2 U6.2 | length 171.4
  Top Layer w0.3: v1(42.112,63.686) 42.112,95.709 v1(48.016,101.612)
  Top Layer w1: P2.2 P2.1 -1.465,100.576 -1.465,69.055 HV-_MC.1 HV-_MC.2 16.742,68.584 33.931,68.584 HV_DETECT.1
  Bottom Layer w0.3: D4.2 35.251,110.094 36.168,111.011 38.647,111.011 42.77,106.889 42.82,106.889 43.345,106.364 46.266,106.364 49.041,103.589 48.641,103.189 48.641,102.5 48.016,101.875 v1(48.016,101.612) 48.016,99.912 54.781,93.147 U6.2 ; HV_DETECT.1 41.354,61.271 41.354,62.91 42.112,63.668 v1(42.112,63.686)
IDC_1: U8.25 X3.9 | length 37.3
  Bottom Layer w0.3: U8.25 82.808,83.524 82.308,83.024 82.308,82.313 83.418,81.203 98.349,81.203 106.467,73.085 111.112,73.085 X3.9
IDC_2: U8.26 X3.10 | length 38.2
  Bottom Layer w0.3: U8.26 82.308,83.731 81.808,83.231 81.808,82.106 83.613,80.3 94.469,80.3 102.184,72.585 110.92,72.585 X3.10
JTAG_RST: R22.1 U8.63 X9.10 | length 29.8
  Top Layer w0.3: v1(86.308,99.478) 86.308,98.22 99.314,85.214 X9.10 99.314,79.73 99.544,79.5 R22.1
  Bottom Layer w0.3: U8.63 v1(86.308,99.478)
JTAG_TCLK: U8.62 X9.4 | length 24.5
  Top Layer w0.3: v1(83.377,91.285) 85.278,91.285 95.504,81.059 X9.4
  Bottom Layer w0.3: v1(83.377,91.285) 83.377,91.569 85.808,93.999 ; 85.185,93.376 85.808,93.999 ; U8.62 85.808,93.999
JTAG_TDI: U8.61 X9.8 | length 28.1
  Top Layer w0.3: v1(83.308,93.682) 84.963,95.337 87.372,95.337 91.403,91.305 91.403,89.112 98.044,82.471 X9.8
  Bottom Layer w0.3: v1(83.308,93.682) 85.308,95.682 U8.61
JTAG_TDO: U8.58 X9.6 | length 25.5
  Top Layer w0.3: v1(81.543,94.17) 81.543,93.978 83.197,92.324 85.509,92.324 96.774,81.059 X9.6
  Bottom Layer w0.3: v1(81.543,94.17) 82.405,95.032 83.253,95.032 83.808,95.587 U8.58
JTAG_TMS: R21.1 U8.64 X9.2 | length 24.6
  Top Layer w0.3: v1(84.808,89.716) 84.994,89.53 85.763,89.53 94.234,81.059 X9.2 ; R21.1 92.231,80.313 92.407,80.489 94.004,80.489 X9.2@94.234,80.259
  Bottom Layer w0.3: v1(84.808,89.716) 86.808,91.716 U8.64
NetC7_1: C7.1 R8.1 R9.1 U4.5 | length 27.6
  Top Layer w0.3: U4.5 101.02,67.261 101.401,66.88 R8.1 103.694,66.88 106.695,63.879 109.956,63.879 110.677,64.6 110.677,68.917 110.03,69.565 107.31,69.565 105.393,71.482 R9.1 102.626,72.2 102.802,72.376 102.802,73.206 C7.1
NetC8_1: C8.1 R11.1 | length 9.8
  Bottom Layer w0.3: C8.1 3.245,101.514 7.644,105.914 R11.1
NetC9_1: C9.1 D1.1 U5.9 U5.17 | length 34.1
  Top Layer w0.3: v1(14.437,95.211) 21.924,95.211 24.787,92.347 v1(27.135,92.347) 27.135,96.566 v1(29.347,98.778)
  Bottom Layer w0.3: v1(14.437,95.211) 15.289,96.062 U5.9 ; U5.17 22.582,92.763 26.719,92.763 v1(27.135,92.347) ; v1(29.347,98.778) C9.1 D1.1
NetC9_2: C9.2 C10.2 C11.1 C13.1 D4.1 L1.1 R14.1 R15.1 R16.2 U5.15 U5.16 U5.20 | length 67.3
  Top Layer w0.3: v1(22.485,89.371) 22.485,86.332 31.388,77.429 L1.1
  Bottom Layer w0.3: U5.15@22.164,94.152 22.024,94.152 21.433,94.742 21.433,100.687 20.758,101.362 C9.2 28.297,101.662 28.297,104.334 29.547,105.584 R16.2@29.547,107.723 ; v1(22.485,89.371) 22.509,89.396 22.509,90.838 U5.20 22.458,90.937 21.988,90.937 21.783,91.142 21.783,93.182 21.988,93.387 22.458,93.387 U5.16 U5.15 26.595,94.112 27.135,94.652 30.85,94.652 32.26,96.062 32.645,96.062 34.635,94.072 35.102,94.072 R15.1 ; R16.2 R16.2@29.547,107.723 ; D4.1 35.632,105.659 35.377,105.914 31.357,105.914 R16.2@29.547,107.723
NetC10_1: C10.1 U5.8 | length 7.4
  Bottom Layer w0.3: U5.8 16.708,95.487 17.178,95.487 19.108,97.417 19.108,101.112 C10.1
NetC11_2: C11.2 D1.2 D2.1 R12.2 | length 18.1
  Bottom Layer w0.3: D1.2 C11.2 35.735,104.264 38.647,101.352 38.647,91.724 D2.1
NetC12_1: C12.1 R16.1 | length 4.1
  Bottom Layer w0.3: C12.1 28.191,107.829 R16.1
NetC12_2: C12.2 U5.13 | length 15.5
  Top Layer w0.3: v1(22.839,104.464) 22.839,98.403 v1(25.104,96.137)
  Bottom Layer w0.3: U5.13 24.295,95.412 25.02,96.137 v1(25.104,96.137) ; v1(22.839,104.464) C12.2
NetC13_2: C13.2 U5.14 | length 4.6
  Bottom Layer w0.3: U5.14 25.199,94.762 25.838,95.402 26.485,95.402 C13.2
NetC14_1: C14.1 D2.2 D3.2 L1.2 R13.1 R17.1 | length 36.6
  Top Layer w0.3: L1.2 38.816,77.506 v1(38.816,84.114)
  Bottom Layer w0.3: v1(38.816,84.114) 38.836,84.135 38.836,86.877 R13.1 38.857,88.514 41.907,91.564 D2.2 42.101,91.42 R17.1 ; 41.857,92.153 41.857,103.026 42.42,103.589 D3.2@42.595,103.589 ; D3.2 D3.2@42.595,103.589 ; C14.1 D3.2@42.595,103.589
"NetIsolation Transformer A1_14": "Isolation Transformer A1.14" R7.1 X2.1 | length 19.1
  Top Layer w0.3: X2.1 75.994,70.124 76.242,70.372 77.778,70.372 78.984,70.372 81.89,67.466 R7.1
"NetIsolation Transformer A1_16": "Isolation Transformer A1.16" R7.2 X2.2 | length 12.3
  Top Layer w0.3: X2.2 78.994,63.711 77.778,64.927 77.778,67.832 79.063,67.832 80.59,66.305 R7.2
NetK1_2: K1.2 Q3.2 | length 8.1
  Bottom Layer w1: K1.2 63.63,70.278 66.076,67.832 Q3.2
NetK1_4: K1.4 R26.1 | length 40.1
  Bottom Layer w1: R26.1 17.134,78.302 19.109,80.278 K1.4
NetM1_U_A+_D: M1_U_A+.D X1_U_A+.1 | length 5.9
  Bottom Layer w1.5: M1_U_A+.D 100.457,62.509 101.615,61.351 X1_U_A+.1
NetM1_U_A-_D: M1_U_A-.D X1_U_A-.1 | length 6.5
  Bottom Layer w1.5: M1_U_A-.D 88.9,62.956 90.505,61.351 X1_U_A-.1
NetQ1_1: Q1.1 R23.1 | length 2.2
  Bottom Layer w0.5: R23.1 Q1.1
NetQ2_1: Q2.1 R24.1 | length 2
  Bottom Layer w0.3: R24.1 Q2.1
NetQ2_3: Q2.3 R23.2 | length 2
  Bottom Layer w0.5: Q2.3 R23.2
NetR2_1: R2.1 U3.3 U8.31 | length 15.2
  Bottom Layer w0.3: U8.31 79.808,81.515 82.558,78.764 82.558,76.518 81.496,75.456 ; U3.3 81.496,75.456 ; R2.1 83.881,74.594 83.025,74.594 82.163,75.456 81.496,75.456
NetR3_2: R3.2 U3.2 U8.33 | length 17.7
  Bottom Layer w0.3: R3.2 74.599,83.296 ; U8.33 76.063,87.182 74.599,85.718 74.599,83.296 ; U3.2 78.849,75.956 74.599,80.206 74.599,83.296
NetR4_1: R4.1 R5.2 U3.15 | length 5.2
  Bottom Layer w0.3: R4.1@72.039,76.777 72.769,76.047 72.769,75.636 73.094,75.311 73.294,75.311 73.294,75.611 73.319,75.636 74.19,75.636 74.51,75.956 U3.15
NetR4_2: R4.2 U3.16 | length 2.9
  Bottom Layer w0.3: R4.2 74.17,77.216 74.93,76.456 U3.16
NetR10_1: R10.1 U4.8 | length 2.9
  Top Layer w0.3: R10.1 99.763,73.23 100.017,72.976 U4.8
NetR11_2: R11.2 U5.10 | length 13.4
  Bottom Layer w0.3: R11.2 12.706,105.914 16.633,101.986 U5.10
NetR12_1: R12.1 R14.2 U5.12 | length 15.8
  Bottom Layer w0.3: U5.12 23.56,96.062 24.997,97.5 36.593,97.5 37.347,98.253 R12.1
NetR13_2: HV_DETECT.2 R13.2 | length 28.9
  Top Layer w0.3: HV_DETECT.2 v1(44.299,85.255)
  Bottom Layer w0.3: R13.2 40.157,86.847 40.432,86.572 42.981,86.572 v1(44.299,85.255)
NetR15_2: R15.2 U5.18 | length 15.2
  Bottom Layer w0.3: U5.18 23.503,92.162 26.148,89.517 32.348,89.517 35.327,92.497 R15.2
NetR17_2: R17.2 U6.1 | length 6.7
  Bottom Layer w0.3: R17.2 48.641,91.37 49.404,90.607 U6.1
NetU3_4: U3.4 U8.32 | length 16.5
  Top Layer w0.3: v1(81.43,78.255) 82.765,76.921 v1(82.765,73.368)
  Bottom Layer w0.3: U8.32 79.308,80.486 81.485,78.31 81.539,78.255 v1(81.43,78.255) ; U3.4 81.177,74.956 v1(82.765,73.368)
NetU3_5: U3.5 U8.34 | length 18.7
  Bottom Layer w0.3: U8.34 75.622,87.682 74.088,86.148 74.088,79.8 79.432,74.456 U3.5
pad: U5.21
Precharge: Q3.1 U8.42 | length 35
  Bottom Layer w0.3: Q3.1 70.86,65.532 71.923,66.595 71.923,72.323 70.36,73.885 70.36,88.469 73.573,91.682 U8.42
RXCAN: U4.4 U8.21 | length 23.9
  Top Layer w0.3: v1(83.986,82.555) 84.026,82.555 84.906,81.674 88.687,77.894 88.687,75.427 90.505,73.609 90.505,69.27 92.514,67.261 U4.4
  Bottom Layer w0.3: v1(83.986,82.555) 83.986,82.732 84.808,83.554 U8.21
TSLive5: U7.2 U8.52 | length 9.8
  Bottom Layer w0.3: U7.2 75.184,101.891 76.051,101.024 77.915,101.024 80.808,98.132 U8.52
TSLive12: R18.2 U6.3 U7.3 X3.4 | length 70.8
  Top Layer w0.3: v1(68.799,93.147) 71.753,93.147 76.127,97.521 v1(76.127,99.691) 76.953,100.517 86.738,100.517 95.017,92.239 95.017,91.251 101.878,84.39 101.878,78.627 X3.4
  Bottom Layer w0.3: U6.3 v1(68.799,93.147) ; U7.3@73.914,102.858 R18.2 ; R18.2@74.063,99.839 75.979,99.839 v1(76.127,99.691)
TSReady5: U7.4 U8.48 | length 11.2
  Bottom Layer w0.3: U7.4 72.644,97.825 73.569,96.899 75.632,94.837 75.787,94.682 U8.48
TSReady12: K1.1 R20.2 U7.5 X1_U_A+.2 X1_U_A-.2 X3.11 | length 111.5
  Top Layer w1: K1.1 65.877,65.278 71.923,59.233 91.522,59.233 X1_U_A-.2 95.273,59.448 102.847,59.448 X1_U_A+.2 111.266,61.216 114.427,64.377 114.427,66.078 X3.11
  Bottom Layer w0.3: K1.1 62.358,66.549 68.761,66.549 69.86,67.648 69.86,88.676 73.208,92.024 73.208,95.462 71.404,97.266 R20.2 71.389,99.706 71.389,103.051 U7.5
TXCAN: U4.1 U8.20 | length 19.5
  Top Layer w0.3: v1(86.308,82.532) 86.308,81.498 89.4,78.406 89.4,75.723 91.218,73.904 91.218,71.785 91.933,71.071 U4.1
  Bottom Layer w0.3: U8.20 85.308,83.532 v1(86.308,82.532)
VDD: C2.2 C5.2 C6.2 C16.2 C17.2 C18.2 C19.2 R2.2 R3.1 R21.2 R22.2 U1.2 U3.1 U3.6 U3.9 U3.12 U4.3 U7.16 U8.7 U8.41 X4.3 X9.1 | length 172.4
  Top Layer w0.3: v1(79.328,78.29) 80.538,79.5 84.448,79.5 85.628,78.32 v1(85.628,78.255) ; R21.2 92.231,76.434 C17.2 94.164,76.409 X9.1 ; U4.3 95.845,68.531 96.182,68.869 96.182,72.241 95.467,72.956 C6.2 94.567,74.239 94.234,74.572 X9.1 ; R22.2 94.567,78.2 94.234,77.867 X9.1
  Top Layer w0.5: v1(82.514,108.485) 86.892,108.485 90.686,104.691 ; v1(90.661,78.406) 90.756,78.312 92.137,78.312 R21.2 ; v1(97.649,109.491) 95.486,109.491 90.686,104.691 ; X4.3 90.686,104.691
  Bottom Layer w0.3: U3.9 74.419,72.956 ; v1(79.328,78.29) 78.275,77.237 ; U3.1 79.056,76.456 78.275,77.237 ; R2.2 85.181,73.306 83.999,72.125 81.971,72.125 81.543,72.553 81.543,73.736 81.323,73.956 U3.6 78.539,73.956 78.039,74.456 U3.12 74.976,74.456 74.419,73.899 74.419,72.956 ; C19.2@91.268,92.395 90.57,92.395 89.857,91.682 U8.7 87.741,91.682 86.4,90.341 86.4,88.902 85.681,88.182 82.472,88.182 81.472,89.182 ; C19.2 91.269,93.343 91.609,93.682 99.561,93.682 X4.3 ; v1(97.649,109.491) 99.949,109.491 ; 74.419,72.956 71.996,72.956 70.86,74.092 70.86,84.874 74.419,88.433 C18.2 74.419,89.842 75.759,91.182 U8.41 79.472,91.182 81.472,89.182 ; 78.275,77.237 77.494,78.018 C5.2 76.454,79.747 75.907,80.294 R3.1 76.104,82.193 76.832,82.193 77.915,83.276 77.915,86.163 80.935,89.182 81.472,89.182
  Bottom Layer w0.5: U7.16 76.479,108.491 78.988,108.491 C16.2 79.032,108.485 v1(82.514,108.485) ; v1(85.628,78.255) 85.703,78.331 90.586,78.331 v1(90.661,78.406)
  Bottom Layer w1: U1.2 99.949,109.491 C2.2
VDDA: C3.2 C20.2 C21.2 U2.2 U8.8 U8.9 X3.1 | length 60.3
  Top Layer w0.5: v1(96.056,91.682) 96.943,90.795 96.943,90.192 99.99,87.145 108.389,87.145 v1(111.506,84.028)
  Top Layer w1: X3.1 111.454,82.427 111.454,83.976 v1(111.506,84.028)
  Bottom Layer w0.3: U8.9 89.697,90.682 90.231,90.148 90.231,89.33 90.595,88.966 C21.2 91.27,89.859 C20.2 90.467,90.696 89.981,91.182 U8.8 ; 91.272,89.859 92.012,89.859 92.025,89.846 94.22,89.846 v1(96.056,91.682)
  Bottom Layer w1: U2.2 C3.2 110.958,100.497 112.316,99.139 112.316,84.838 v1(111.506,84.028)
pads on no net: "Isolation Transformer A1.2" "Isolation Transformer A1.4" "Isolation Transformer A1.5" "Isolation Transformer A1.6" "Isolation Transformer A1.7" "Isolation Transformer A1.8" "Isolation Transformer A1.9" "Isolation Transformer A1.10" "Isolation Transformer A1.11" "Isolation Transformer A1.12" "Isolation Transformer A1.13" "Isolation Transformer A1.15" HV+_Bat.MH HV+_MC.MH HV-_MC.MH HV_DETECT.MH Q3.4 U1.THM U2.THM U5.11 U5.19 U7.6 U7.7 U7.9 U7.10 U7.11 U7.12 U7.14 U7.15 U8.2 U8.3 U8.4 U8.5 U8.6 U8.11 U8.12 U8.13 U8.16 U8.17 U8.18 U8.19 U8.22 U8.23 U8.24 U8.27 U8.28 U8.35 U8.36 U8.37 U8.38 U8.39 U8.43 U8.44 U8.45 U8.46 U8.47 U8.49 U8.50 U8.51 U8.53 U8.54 U8.55 U8.56 U8.57 U8.59 U8.60 X1_U_A+.MH X1_U_A-.MH X2.MH X3. X9.7 X9.9
copper on no net: | length 20.6
  Top Layer w0.254: 11.5,110.5 cw(c12,110.5) 12,111 ; 19.5,111 cw(c19.5,110.5) 20,110.5 ; 13,109.5 ccw(c12.5,109.5) 13,109.5 ; 15.5,108.5 ccw(c14.5,108.5) 15.5,108.5 ; 18,108.5 ccw(c17,108.5) 18,108.5 ; 19.5,109.5 ccw(c19,109.5) 19.5,109.5
  Bottom Layer w0.3: 22.533,96.712 22.611,96.712 22.686,96.787

## Polygon pours and split planes (outlines as drawn)
GND on Bottom Layer "Bottom Layer-No Net" (solid, remove dead copper, pour order 2): 57.831,117.848 58.103,117.577 121.484,117.577 121.484,44.966 123.248,43.202 123.113,43.066 59.188,43.066
GND on Top Layer "Top Layer-No Net" (solid, remove dead copper, pour order 4): 57.831,117.848 58.103,117.577 121.484,117.577 121.484,44.966 123.248,43.202 123.113,43.066 59.188,43.066

## Keep-outs
Keep-Out Layer:
  the board outline again, w1.2